# Altium PCB 矩形板V6.0(可制造).pcbdoc (part 2 of 2)
Units mil, origin at the board's own origin, x right, y up, seen from the top; angles counter-clockwise.
Board outline 3015.63 x 3960.03 mil, 2 copper layers (Top Layer, Bottom Layer); 162 components, 167 nets, 711 pads, 292 vias.
Unrouted connection lines stored in the file: 13.
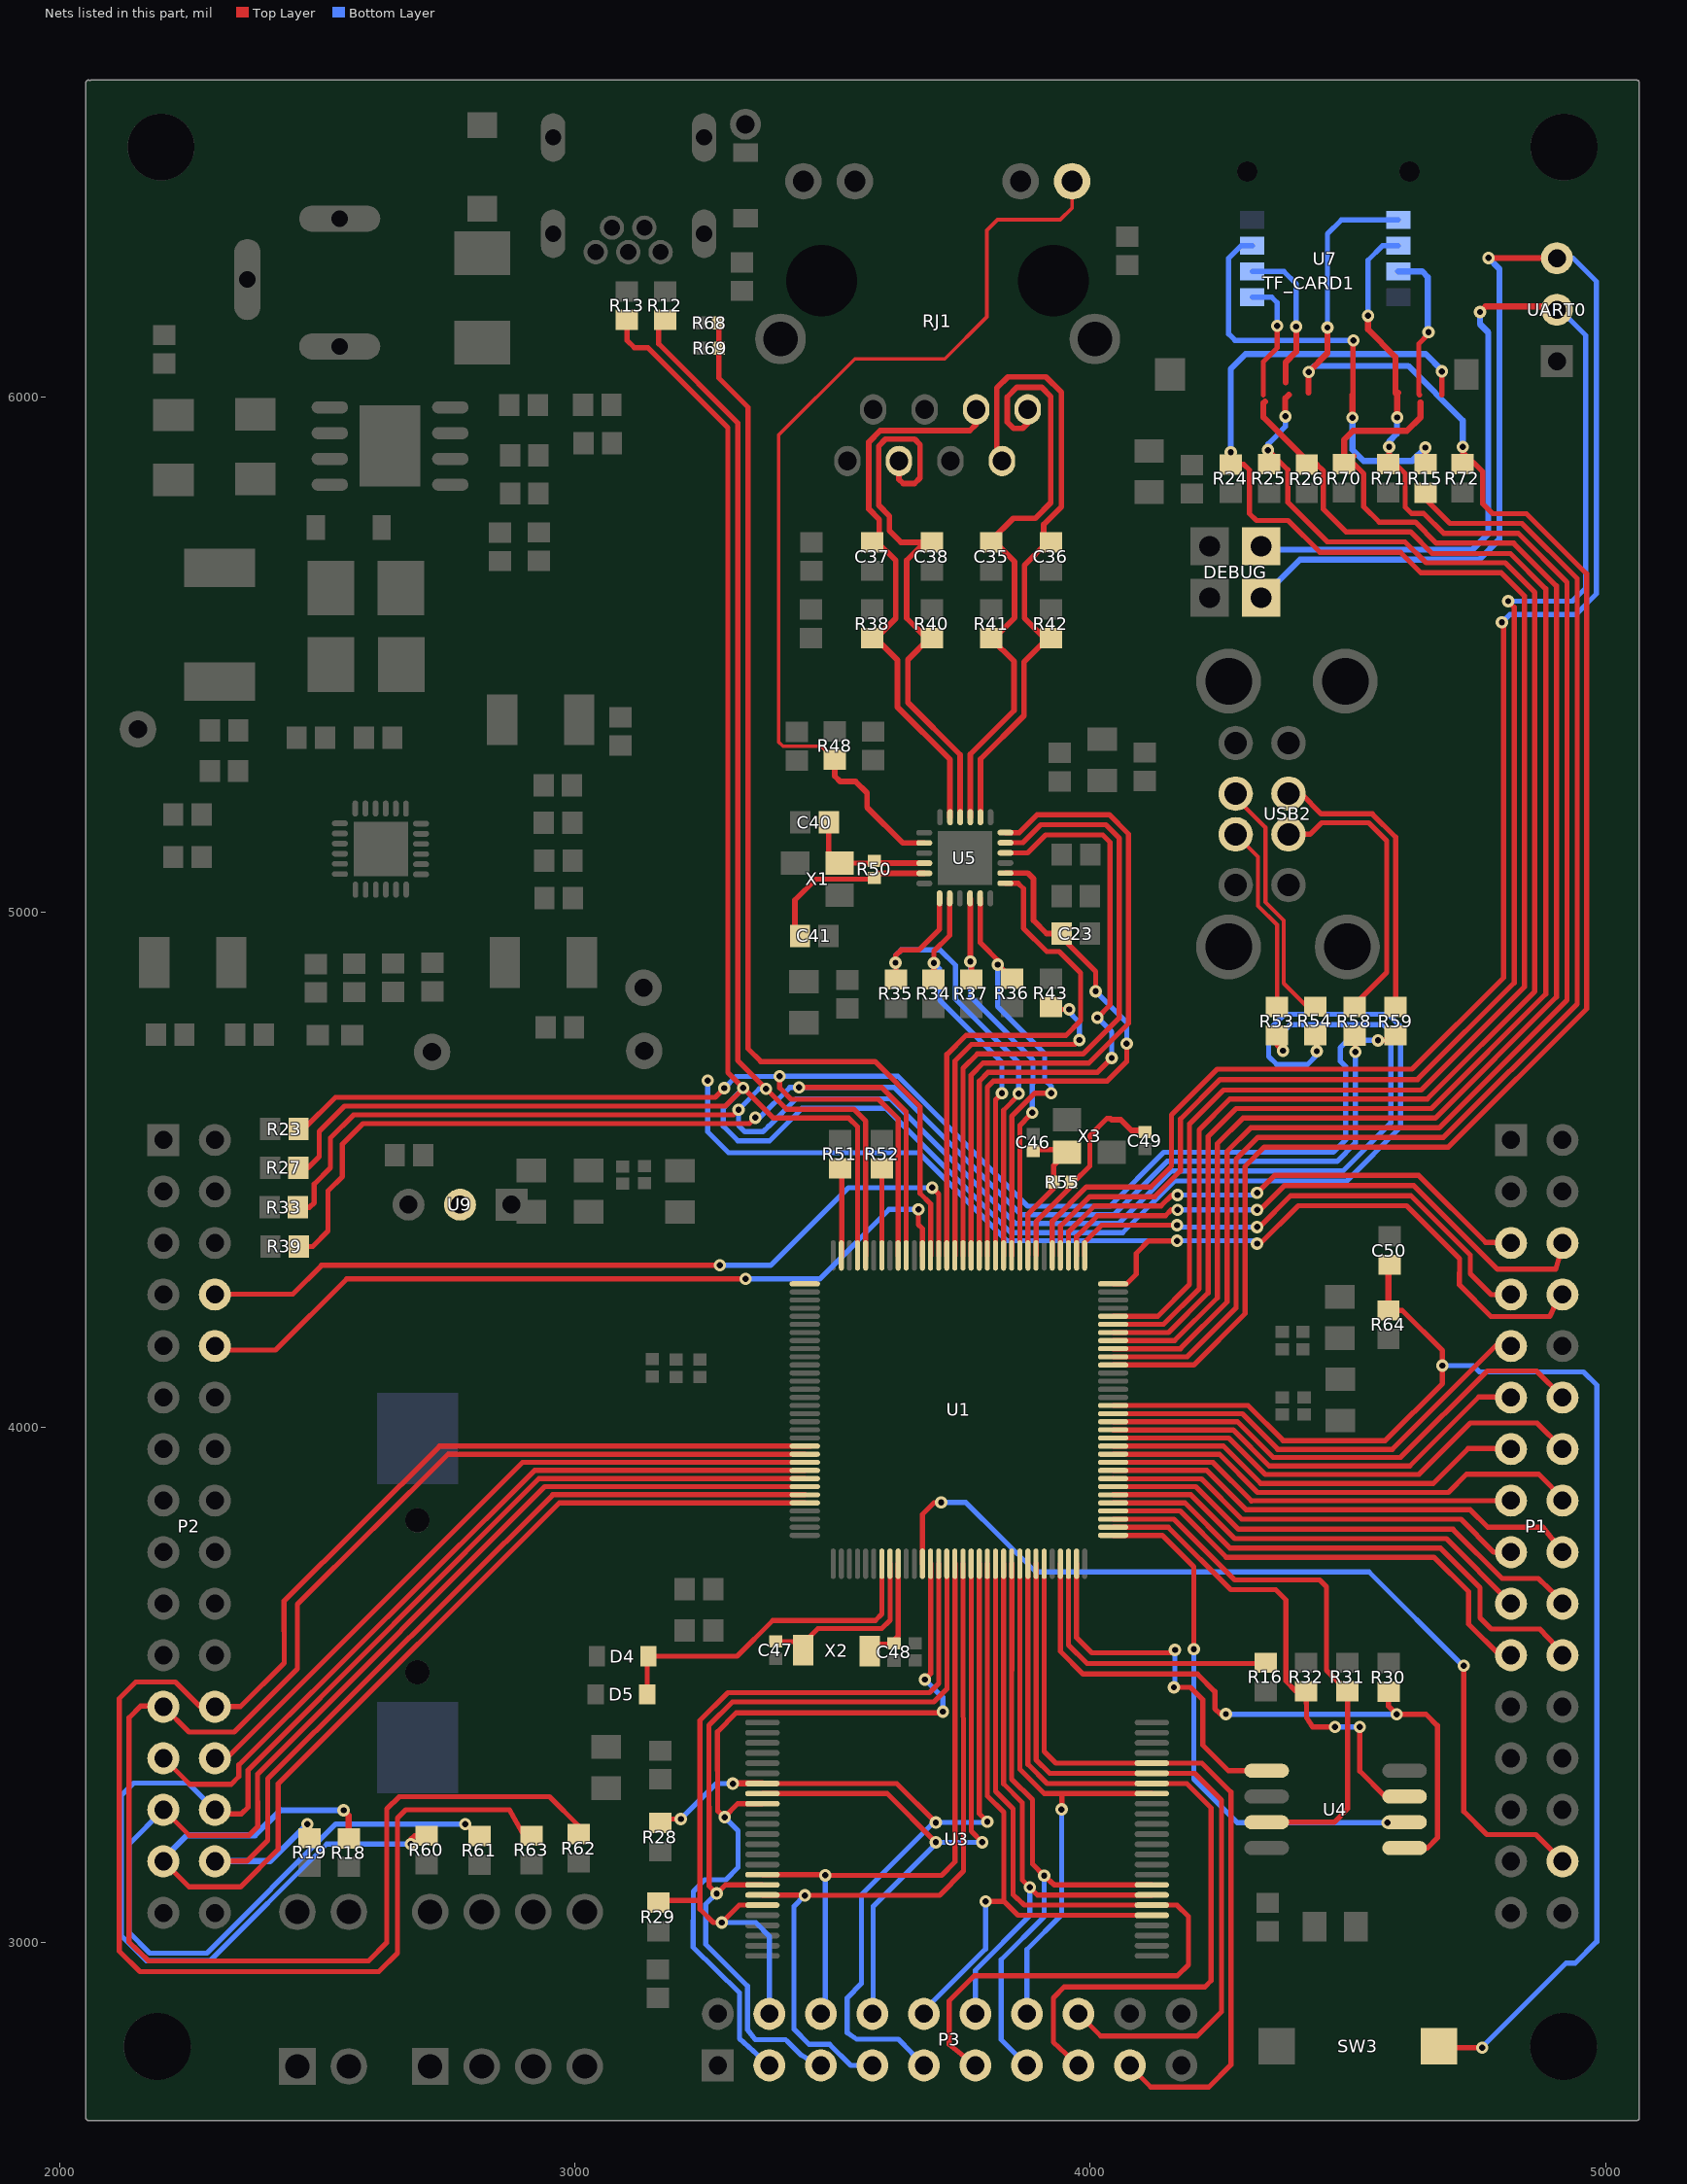
[diagram p2: the nets of this part, all layers, seen from the top]

## Via types
v1: diameter 24, hole 12, Top Layer to Bottom Layer, 292 vias

## Nets (pads, with @x,y where several pads share a name; then routed paths per layer and width w, separated by ;. In a path a pad name is that pad's centre, name@x,y a point inside that pad or via, vN(x,y) a via of type N, cw(c..) or ccw(c..) an arc to the next point about the centre after c; other vN are vias at no path point) (continued)
PC0: P1.30 U1.44 | length 1804.6
  Top Layer w9.84: U1.44@3674.21,3735.64 3674.22,3831.68 3696.32,3853.68 v1@3710.42,3854.48 ; P1.30@4918.95,3155.9 P1.30@4921.09,3158.06
  Top Layer w10: v1(4725.03,3537.59) 4725.03,3254.97 4770,3210 4864.82,3210 P1.30@4916.76,3158.06
  Bottom Layer w9.84: v1@3710.42,3854.48 3758.52,3854.48 3893.92,3719.88 4541.16,3719.88 4723.45,3537.59 v1(4725.03,3537.59)
  other v1: 3710.46,3854.52
PC1: P3.3 U1.45 U3.9 | length 1632.3
  Top Layer w9.84: U3.9@3363.61,3269.88 3315.62,3269.88 v1(3290.23,3243.76) 3276.62,3255.78 3276.38,3409.63 3312.5,3446.22 3711.22,3446.22 v1(3713.61,3448.61) ; v1(3678.96,3510.82) 3690.09,3521.95 U1.45@3690.09,3735.9
  Bottom Layer w9.84: v1(3290.23,3243.76) 3316.32,3217.48 3316.32,3146.18 3292.42,3122.28 3251.82,3122.28 3229.32,3099.78 3229.02,2990.98 3319.12,2903.08 3319.12,2814.18 P3.3@3377,2762
  Bottom Layer w10: v1(3678.96,3510.82) 3713.61,3476.17 v1(3713.61,3448.61)
PC2: P3.4 R29.2 U1.46 U3.19 | length 1576.4
  Top Layer w9.84: R29.2@3156.72,3082.08 3240.82,3082.08 ; U3.19@3363.61,3073.03 3318.67,3073.03 v1(3284.82,3039.18) 3268.32,3039.18 3242.32,3065.18 3242.32,3431.68 3296.32,3485.58 3688.02,3485.58 3705.82,3503.38 U1.46@3705.82,3735.88
  Bottom Layer w10: v1(3284.82,3039.18) 3350.82,3039.18 3377,3013 P3.4@3377,2862
PC3: P3.5 U1.47 U3.17 | length 1638.9
  Top Layer w9.84: v1(3274.84,3095.66) 3260.32,3110.18 3259.82,3421.98 3305.32,3467.48 3696.32,3467.48 3721.62,3492.68 U1.47@3721.62,3735.88 ; v1(3274.84,3095.66) 3291.57,3112.4 U3.17@3363.61,3112.4
  Bottom Layer w9.84: v1(3274.84,3095.66) 3253.72,3075.28 3253.72,2997.08 3334.52,2916.28 3334.52,2831.08 3349.62,2811.88 3408.52,2811.98 3411.72,2809.18 3438.82,2782.08 3472.42,2761.98 P3.5@3477,2762
PC4: P3.6 U1.48 U3.16 | length 1236.4
  Top Layer w9.84: U3.16@3363.61,3132.08 3484.48,3132.08 v1(3485.66,3130.9) ; v1@3485.62,3130.88 3711.22,3130.88 3737.32,3156.98 U1.48@3737.32,3735.88
  Bottom Layer w9.84: P3.6@3477,2862 3485.66,2870.67 v1(3485.66,3130.9)
PC5: P3.7 U1.49 U3.18 | length 1456.9
  Top Layer w9.84: U3.18@3363.61,3092.71 3445.1,3092.71 v1(3445.89,3091.92) 3707.82,3091.88 3753.72,3138.98 U1.49@3753.12,3735.78
  Bottom Layer w10: v1(3445.89,3091.92) 3424.62,3070.65 3424.62,2832.49 3454.1,2803 3493.98,2803 3534.98,2762 P3.7@3577,2762
PC6: P3.8 U1.50 U3.8 | length 1399.5
  Top Layer w9.84: U3.8@3363.61,3289.56 3605.72,3289.56 v1(3700.19,3195.1) ; U1.50@3768.79,3735.9 3768.79,3216.5 v1(3790.19,3195.1)
  Bottom Layer w9.84: P3.8@3577,2862 3578.57,2863.58 3578.57,3070.66 3700.19,3192.28 v1(3700.19,3195.1) v1(3790.19,3195.1)
PC7: P3.9 R28.1 U1.51 U3.7 | length 1862
  Top Layer w9.84: R28.1@3165.19,3232.66 3172.63,3240.1 v1(3205.19,3240.1) ; U3.7@3363.61,3309.25 3624.3,3309.25 v1(3700.19,3233.37) ; U1.51@3784.59,3735.9 3784.59,3250.7 v1(3800.19,3235.1)
  Top Layer w11.81: v1(3306.13,3308.85) 3306.53,3309.25 U3.7@3363.61,3309.25
  Bottom Layer w9.84: P3.9@3677,2762 3627.62,2812.78 3546.32,2812.78 3528.22,2825.38 3528.22,2893.08 3556.12,2921.08 3556.12,3093.48 3696.02,3233.38 v1(3700.19,3233.37) ; v1(3700.19,3233.37) 3798.46,3233.37 v1(3800.19,3235.1)
  Bottom Layer w10: v1(3205.19,3240.1) 3273.94,3308.85 v1(3306.13,3308.85)
PC8: P3.10 U1.52 U3.29 | length 1270.6
  Top Layer w9.84: v1(3796.68,3080.5) 3832.12,3080.5 ; U1.52@3800.32,3735.88 3800.32,3284.98 3832.12,3253.18 3832.12,3080.48 ; U3.29@4119.52,3053.38 3859.62,3053.38 3832.12,3080.48
  Bottom Layer w10: P3.10@3677,2862 3677,2868.21 3796.68,2987.89 v1(3796.68,3080.5)
PC9: P3.11 U1.53 U3.30 | length 1750.9
  Top Layer w9.84: P3.11@3777,2762 3726.22,2802.58 3726.22,2887.58 3774.52,2935.98 4169.02,2935.98 4190.42,2957.28 4190.42,3050.98 4168.32,3072.98 U3.30@4119.51,3073.03 3871.82,3072.98 3850.22,3093.58 3850.22,3260.08 3816.12,3293.78 U1.53@3816.12,3735.88
PC10: P3.12 U1.54 U3.31 | length 1181.8
  Top Layer w9.84: U1.54@3831.82,3735.88 3831.82,3308.48 3868.32,3271.88 3868.32,3121.86 v1(3882.51,3107.67) 3897.47,3092.71 U3.31@4119.51,3092.71
  Bottom Layer w10: P3.12@3777,2862 3777,2947 3882.51,3052.51 v1(3882.51,3107.67)
PC11: P3.13 U1.55 U3.32 | length 1271.1
  Top Layer w9.84: U1.55@3847.62,3735.88 3847.42,3317.78 3887.62,3277.68 3887.62,3152.95 v1(3910.46,3130.11) 3930.42,3112.38 U3.32@4119.51,3112.4
  Bottom Layer w10: P3.13@3877,2762 3827.02,2811.98 3827.02,2967.02 3910.46,3050.46 v1(3910.46,3130.11)
PC12: P3.14 U1.56 U3.41 | length 1130.4
  Top Layer w9.84: U1.56@3863.29,3735.9 3863.29,3337 3910.72,3289.56 U3.41@4119.51,3289.56 ; v1(3944.32,3258.85) 3944.77,3259.3 3944.77,3289.56
  Bottom Layer w10: P3.14@3877,2862 3877,2987 3944.32,3054.32 v1(3944.32,3258.85)
PC13: P3.15 U1.57 U3.42 | length 1588
  Top Layer w9.84: U1.57@3879.09,3735.9 3879.09,3346.2 3916.03,3309.25 U3.42@4119.51,3309.25 ; P3.15@3977,2762 3928.22,2807.28 3928.22,2893.08 3949.32,2914.38 4222.62,2914.38 4234.42,2926.58 4234.52,3261.88 4187.22,3309.28 U3.42@4119.52,3309.28
PC14: P3.16 U1.58 U3.43 | length 1498.8
  Top Layer w9.84: U1.58@3894.79,3735.9 3894.79,3355.5 3921.36,3328.93 U3.43@4119.51,3328.93 ; P3.16@3977,2862 4020.32,2819.08 4207.72,2819.08 4254.92,2866.28 4254.92,3276.98 4203.02,3328.88 U3.43@4119.51,3328.93
PC15: P3.17 U1.59 U3.44 | length 1521.7
  Top Layer w9.84: U1.59@3910.62,3735.88 3910.62,3371.38 3933.38,3348.62 U3.44@4119.51,3348.62 4216.72,3348.58 4273.02,3292.38 4273.02,2763.02 4230,2720 4117.4,2720 P3.17@4075.42,2761.98
PD2: R30.1 U1.61 U4.1 | length 1321.7
  Top Layer w10: U1.61@3942.02,3735.68 3942.02,3565.48 3986.02,3521.48 4208.12,3521.48 4241.92,3487.58 4241.92,3454.48 4252.62,3443.88 v1(4263.22,3443.89) ; R30.1@4578.92,3487.58 4578.92,3459.28 v1(4594.71,3443.49) 4652.02,3443.48 4673.82,3421.48 4673.82,3203.38 4654.32,3183.88 U4.1@4610.02,3183.88
  Bottom Layer w10: v1(4263.22,3443.89) 4263.62,3443.49 v1(4594.71,3443.49)
PD3: R16.2 U1.62 | length 552.8
  Top Layer w10: U1.62@3957.71,3735.64 3957.71,3578.14 3993.93,3541.92 R16.2@4338.02,3541.92
PD4: U1.63 U4.5 | length 723.7
  Top Layer w10: U1.63@3973.41,3735.64 3973.41,3592.36 4002.98,3562.79 4164.4,3562.79 v1(4164.4,3568.3) ; v1(4162.43,3495.86) 4194.31,3495.86 4218.33,3471.84 4218.33,3384.05 4268.53,3333.85 U4.5@4342.35,3333.85
  Bottom Layer w10: v1(4162.43,3495.86) 4164.4,3497.83 v1(4164.4,3568.3)
PD5: U1.65 U4.2 | length 1038.2
  Top Layer w10: U1.65@4044.32,3790.78 4139.62,3790.78 4201.01,3729.39 v1(4201.01,3569.87) ; v1(4576.99,3233.26) 4609.48,3233.26 U4.2@4610.07,3233.85
  Bottom Layer w10: v1(4201.01,3569.87) 4201.01,3317.49 4285.24,3233.26 v1(4576.99,3233.26)
PD6: R32.1 U1.66 U4.3 | length 956.4
  Top Layer w10: U1.66@4044.32,3806.58 4151.32,3806.58 4272.62,3685.18 4360.02,3685.18 4379.72,3665.58 4379.72,3508.08 4399.42,3488.38 R32.1@4419.12,3488.38 4419.91,3436.41 4431.72,3419.09 v1(4475.03,3419.09) ; v1(4523.06,3419.09) 4523.06,3333.26 4572.47,3283.85 U4.3@4610.07,3283.85
  Bottom Layer w10: v1(4475.03,3419.09) v1(4523.06,3419.09)
PD7: R31.1 U1.67 U4.7 | length 1084.5
  Top Layer w10: U1.67@4044.32,3822.28 4162.42,3822.28 4280.52,3704.08 4445.12,3704.08 4458.52,3690.78 4458.52,3528.94 4499.08,3488.38 R31.1@4499.44,3488.38 ; U4.7@4342.35,3233.85 4473.26,3233.85 4499.44,3260.03 R31.1@4499.44,3488.38
PD8: P1.21 U1.68 | length 924.8
  Top Layer w10: U1.68@4044.32,3837.98 4174.32,3837.98 4264.02,3748.18 4666.72,3748.18 4734.52,3681.48 4734.42,3618.38 4795.12,3557.68 P1.21@4816.22,3557.68
PD9: P1.22 U1.69 | length 1034.5
  Top Layer w10: U1.69@4044.32,3853.78 4183.72,3853.78 4271.12,3766.28 4679.42,3766.28 4756.52,3689.18 4756.52,3630.48 4778.22,3608.88 4873.02,3608.88 P1.22@4921.12,3558.08
PD10: P1.19 U1.70 | length 860.4
  Top Layer w10: U1.70@4044.32,3869.48 4195.52,3869.48 4280.52,3784.48 4691.52,3784.48 P1.19@4816.76,3658.06
PD11: P1.20 U1.71 | length 970.2
  Top Layer w10: U1.71@4044.32,3885.28 4204.92,3885.28 4287.62,3802.58 4704.12,3802.58 4799.42,3706.98 4869.51,3706.88 P1.20@4921.12,3658.08
PD12: P1.17 U1.72 | length 835.8
  Top Layer w10: U1.72@4044.32,3900.98 4215.92,3900.18 4293.92,3822.28 4719.42,3822.28 4783.02,3758.08 P1.17@4821.12,3758.08
PD13: P1.18 U1.73 | length 941.6
  Top Layer w10: U1.73@4044.32,3916.78 4226.22,3916.78 4302.62,3840.38 4737.62,3840.38 4771.52,3806.48 4878.62,3806.48 P1.18@4916.72,3758.08
PD14: P1.15 U1.74 | length 803.4
  Top Layer w10: U1.74@4044.32,3932.48 4238.02,3932.48 4312.82,3857.68 P1.15@4816.76,3858.06
PD15: P1.16 U1.75 | length 943.3
  Top Layer w10: U1.75@4044.32,3948.28 4250.62,3948.18 4324.62,3874.18 4695.12,3874.18 4730.22,3909.28 4870.42,3909.28 P1.16@4921.12,3858.08
PE0: R37.2 U1.105 U5.10 | length 805
  Top Layer w10: U1.105@3863.21,4334.03 3863.21,4586.4 3872.67,4595.86 3872.67,4596.25 v1(3887.63,4611.21)
  Top Layer w11.02: R37.2@3758.1,4880.11 R37.2@3768.73,4869.48 3768.73,4902.94 v1(3767.15,4904.52) 3767.15,5026.44 U5.10@3766.53,5027.07
  Bottom Layer w10: v1(3767.15,4904.52) 3767.15,4837.2 3840.82,4763.53 3840.82,4761.18 3888.82,4713.18 3888.82,4667.48 3887.63,4666.29 v1(3887.63,4611.21)
PE1: R36.2 U1.106 U5.11 | length 839.3
  Top Layer w10: U5.11@3786.23,5027.07 3786.22,4941.35 3792.74,4934.83 3820.3,4907.28 v1(3820.3,4898.22) 3820.68,4898.22 R36.2@3847.86,4871.05 ; U1.106@3847.51,4334.03 3847.52,4603.78 3892.72,4648.98 v1(3924.24,4649)
  Bottom Layer w10: v1(3820.3,4898.22) 3820.3,4817.12 3911.64,4725.78 3911.64,4674.6 3924.24,4662 v1(3924.24,4649)
PE2: R35.2 U1.107 U5.7 | length 986.6
  Top Layer w10: v1(3621.88,4902.15) 3622.67,4901.37 R35.2@3622.67,4869.48 ; v1(3621.88,4902.15) 3621.92,4915.98 3632.92,4926.98 3667.22,4926.98 3707.52,4967.28 U5.7@3707.53,5027.07 ; U1.107@3831.71,4334.03 3831.71,4615.93 3860.85,4645.07 v1(3860.85,4648.22)
  Bottom Layer w10: v1(3621.88,4902.15) 3621.92,4915.98 3632.92,4926.98 3708.52,4926.98 3738.42,4897.08 3738.42,4831.28 3860.82,4708.88 v1@3860.82,4648.18
PE3: R34.2 U1.108 U5.8 | length 794.6
  Top Layer w10: v1(3696.29,4901.76) 3696.32,4924.58 3727.22,4955.48 U5.8@3727.23,5027.07 ; U1.108@3816.01,4334.03 3816.01,4636.44 v1(3828.57,4649)
  Top Layer w11.02: v1(3696.29,4901.76) 3696.29,4875.71 R34.2@3698.22,4873.78
  Bottom Layer w10: v1(3696.29,4901.76) 3707.71,4890.35 3707.71,4829.33 3828.57,4708.47 v1(3828.57,4649)
PE4: C23.2 U1.109 U5.14 | length 1126.3
  Top Layer w10: U1.109@3800.21,4334.03 3800.22,4660.78 3811.62,4672.28 4032.52,4672.28 4070.72,4710.38 v1(4070.7,4745.07) ; C23.2@3944.32,4958.45 3944.32,4951.38 4010.42,4885.18 v1@4010.42,4846.68
  Top Layer w11.02: U5.14@3835.22,5075.98 3878.72,5075.98 3890.02,5064.78 3890.02,4984.08 3915.22,4958.88 3936.42,4958.88 C23.2@3944.32,4966.68
  Bottom Layer w10: v1(4010.46,4846.64) 4070.7,4786.4 v1(4070.7,4745.07)
PE5: U1.110 U5.16 | length 1277.8
  Top Layer w10: U1.110@3784.51,4334.03 3784.52,4672.28 3801.42,4689.18 4013.62,4689.18 v1@4041.52,4717.08 ; U5.16@3835.27,5115.31 3878.34,5115.31 3913.22,5150.19 4024.24,5150.19 4038.41,5136.02 4038.41,4819.88 v1(4014,4795.46)
  Bottom Layer w10: v1(4014,4795.46) 4041.56,4767.9 v1(4041.56,4717.11)
PE6: U1.111 U5.18 | length 1334
  Top Layer w10: U1.111@3768.71,4334.03 3768.72,4683.98 3791.92,4707.28 3997.42,4707.28 4074.22,4784.08 4074.22,5152.18 4036.82,5189.58 3897.12,5189.58 3862.22,5154.68 U5.18@3835.22,5154.68
PE7: U1.112 U5.17 | length 1302.1
  Top Layer w10: U1.112@3753.01,4334.03 3753.02,4697.08 3780.92,4724.98 3986.02,4724.98 4056.52,4795.48 4056.52,5143.48 4030.12,5169.88 3904.12,5169.88 3869.32,5134.98 U5.17@3835.22,5134.98
PE8: R43.1 U1.113 | length 743.4
  Top Layer w10: U1.113@3737.21,4334.03 3737.22,4711.18 3769.52,4743.48 3970.32,4743.48 v1@3978.92,4752.18 ; R43.1@3923.45,4815.94 3927.79,4811.6 v1(3959.28,4811.6)
  Bottom Layer w10: v1(3959.28,4811.6) 3956.53,4808.85 3978.96,4786.41 v1(3978.96,4752.15)
PE9: U1.114 U5.13 | length 1032.6
  Top Layer w10: U1.114@3721.51,4334.03 3721.52,4724.18 3758.52,4761.18 3952.62,4761.18 3981.32,4789.98 3981.32,4882.08 3939.62,4923.78 3915.62,4923.78 3870.32,4969.08 3870.32,5045.88 3859.82,5056.28 U5.13@3835.22,5056.28
PE10: P2.8 U1.115 | length 1614.4
  Top Layer w10: P2.8@2301.02,4258.48 2451.82,4258.88 2507.69,4314.75 v1(3280.93,4314.75) ; v1(3693.14,4465.54) 3705.72,4452.96 U1.115@3705.72,4334.08
  Bottom Layer w10: v1(3280.93,4314.75) 3379.59,4314.75 3530.38,4465.54 v1(3693.14,4465.54)
PE11: R68.1 R69.2 U1.116 | length 2110.6
  Top Layer w10: R69.2@3279.13,6094.67 3279.12,6036.68 3335.62,5980.08 3335.62,4735.18 3360.42,4710.38 3582.12,4710.38 3669.52,4622.98 3669.52,4454.48 3690.02,4433.98 U1.116@3690.01,4334.03
  Top Layer w11.02: R68.1@3277.56,6143.89 3279.13,6142.31 R69.2@3279.13,6094.67
PE12: P2.10 U1.117 | length 1584.1
  Top Layer w10: P2.10@2288.02,4150.18 2418.32,4150.18 2556.52,4288.38 v1(3330.93,4288.37) ; v1(3666.37,4423.41) 3666.37,4393.93 3674.22,4386.08 U1.117@3674.22,4334.08
  Bottom Layer w10: v1(3330.93,4288.37) 3474.42,4288.38 3609.45,4423.41 v1(3666.37,4423.41)
PF0: R72.1 TF_CARD1.3 U1.86 U7.5 | length 3506.7
  Top Layer w10: U1.86@4044.31,4121.44 4200.92,4121.38 4300.62,4221.08 4300.62,4506.88 4338.02,4544.28 4695.12,4544.28 4963.62,4812.78 4963.62,5656.88 4846.72,5773.78 4780.92,5773.78 4761.64,5793.06 4761.64,5855.31 4723.06,5893.88 v1(4723.06,5903.33) 4723.06,5870.62 R72.1@4722.27,5869.87
  Top Layer w11.81: 4423.82,6008.48 v1@4423.82,6048.58 ; v1@4423.85,6048.61 4460.46,6085.22 v1(4460.46,6134.83)
  Bottom Layer w10: v1(4460.46,6134.83) 4460.46,6316.72 4487.43,6343.69 U7.5@4597.86,6343.69
  Bottom Layer w11.81: v1@4423.85,6048.61 4435.66,6060.42 4617.15,6060.42 4723.06,5954.52 v1(4723.06,5903.33)
  other v1: 4423.85,6048.61
PF1: R15.1 U1.87 | length 2549.7
  Top Layer w10: U1.87@4044.32,4137.28 4188.12,4137.28 4282.92,4232.08 4282.92,4520.68 4325.42,4563.18 4686.02,4563.18 4945.12,4822.28 4945.12,5647.78 4838.02,5754.88 4697.92,5754.88 4650.62,5802.18 R15.1@4650.61,5814.37
PF2: R71.1 TF_CARD1.7 U1.88 U7.6 | length 3114.7
  Top Layer w10: U1.88@4044.31,4152.94 4174.92,4152.88 4265.62,4243.58 4265.62,4535.98 4311.22,4581.68 4677.42,4581.68 4925.42,4829.68 4925.42,5640.78 4830.52,5735.58 4685.72,5735.58 4647.12,5774.18 4623.42,5774.18 4611.22,5786.38 4611.22,5851.38 4592.72,5869.88 R71.1@4578.52,5869.88
  Top Layer w11.81: v1(4539.2,6157.66) 4539.22,6131.28 4592.32,6078.18 4592.32,6008.08 TF_CARD1.7@4595.9,6004.52 ; R71.1@4580.14,5879.63 v1(4580.14,5903.33) ; v1(4595.5,5960.42) 4595.52,6006.08 4597.82,6008.48
  Bottom Layer w10: v1(4539.2,6157.66) 4539.22,6265.58 4567.32,6293.68 U7.6@4597.82,6293.68
  Bottom Layer w11.81: v1(4580.14,5903.33) 4580.14,5913.57 4595.1,5928.53 4595.1,5960.03 v1(4595.5,5960.42)
PF3: R70.1 TF_CARD1.8 U1.89 U7.7 | length 3226.3
  Top Layer w9.84: R70.1@4491.96,5869.89 4496.29,5869.89 R70.1@4512.43,5886.02
  Top Layer w10: U1.89@4044.31,4168.73 4163.62,4168.68 4246.72,4251.78 4246.72,4550.98 4296.32,4600.58 4669.92,4600.58 4904.92,4835.58 4904.92,5633.28 4821.92,5716.28 4671.92,5716.28 4630.92,5757.28 4560.82,5757.28 4530.92,5787.18 4530.92,5850.98 4512.02,5869.88 R70.1@4492.74,5869.88 ; TF_CARD1.8@4639.2,6004.52 4637.62,6006.09 4637.62,6103.34 4656.52,6122.23 v1(4656.52,6125.77)
  Top Layer w11.81: R70.1@4492.74,5869.88 4492.72,5917.08 4510.12,5934.48 4614.82,5934.48 4640.82,5960.38 4640.82,5989.68
  Bottom Layer w11.81: U7.7@4597.86,6243.69 4640.77,6243.69 4644.51,6243.69 4655.34,6232.86 4655.34,6126.95 v1(4656.52,6125.77)
PF4: R26.1 TF_CARD1.1 U1.90 U7.1 | length 3084.5
  Top Layer w10: U1.90@4044.32,4184.48 4151.82,4184.48 4228.62,4261.18 4228.62,4564.78 4282.92,4619.08 4662.02,4619.08 4884.12,4841.18 4884.12,5627.68 4815.62,5696.28 4663.62,5696.28 4621.52,5738.38 4496.32,5738.38 4452.62,5782.08 4452.62,5856.48 4440.02,5869.08 R26.1@4420.3,5869.09 ; TF_CARD1.1@4336.05,6004.52 4336.02,6068.28 4362.82,6095.08 v1(4362.82,6137.98)
  Top Layer w11.81: 4339.22,5991.18 4336.02,5987.98 4336.02,5960.78 4420.32,5876.58 R26.1@4420.3,5869.09
  Bottom Layer w10: U7.1@4314.4,6193.69 4352.39,6193.69 4362.82,6183.26 v1(4362.82,6137.98)
PF5: R25.1 TF_CARD1.2 U1.91 U7.2 | length 3156.9
  Top Layer w10: U1.91@4044.32,4200.28 4142.02,4200.28 4211.22,4269.48 4211.22,4577.78 4271.12,4637.58 4654.12,4637.58 4862.82,4846.28 4862.82,5620.68 4805.32,5678.18 4651.72,5678.18 4610.82,5719.08 4460.12,5719.08 4383.32,5795.88 4383.32,5858.88 v1@4345.12,5897.08 ; v1@4345.17,5897.03 4347.07,5895.14 R25.1@4347.07,5869.48
  Top Layer w11.81: v1(4378.57,5962.39) 4378.57,5997.43 4385.22,6004.08 ; 4379.32,6028.88 4379.32,6049.78 4379.32,6067.48 4399.82,6087.98 v1(4399.83,6136.8)
  Bottom Layer w10: U7.2@4314.4,6243.69 4376.01,6243.69 4399.83,6219.87 v1(4399.83,6136.8) ; v1(4345.1,5897.03) 4345.1,5908.85 4378.57,5942.31 v1(4378.57,5962.39)
PF6: R24.1 TF_CARD1.9 U1.92 | length 3397.1
  Top Layer w10: U1.92@4044.31,4215.94 4130.92,4215.88 4192.72,4277.68 4192.72,4589.18 4258.42,4654.88 4642.32,4654.88 4842.72,4855.28 4842.72,5613.98 4797.82,5658.88 4641.92,5658.88 4602.22,5698.58 4445.92,5698.58 4384.12,5760.38 4322.62,5760.38 4308.92,5774.18 4308.92,5858.48 4298.22,5869.08 R24.1@4272.62,5869.08 ; TF_CARD1.9@4682.51,6004.52 v1(4682.51,6049.79)
  Top Layer w11.81: R24.1@4272.62,5869.08 v1(4272.62,5892.7)
  Bottom Layer w11.81: v1(4272.62,5892.7) 4272.62,6054.48 4301.39,6083.26 4651.05,6083.26 4682.51,6051.79 v1(4682.51,6049.79)
PF7: P1.8 U1.96 | length 2208.8
  Top Layer w10: U1.96@4044.32,4278.98 4070.32,4278.98 4089.22,4297.78 4089.22,4337.98 4113.63,4362.39 v1(4168.33,4362.39) ; v1@4323.82,4356.88 4325.02,4355.68 4328.92,4355.68 4403.72,4430.48 4614.02,4430.48 4716.82,4327.68 4716.72,4276.58 4777.82,4215.58 4892.32,4215.58 4911.72,4258.08 P1.8@4916.72,4258.08
  Bottom Layer w9.84: v1(3257.31,4673.41) 3257.32,4573.78 3297.82,4533.28 3667.13,4533.28 3838.02,4362.39 v1(4168.33,4362.39) 4318.34,4362.39 v1@4323.85,4356.88
  other v1: 4323.85,4356.88
PF8: P1.7 U1.97 | length 994.5
  Top Layer w10: U1.97@3989.22,4334.08 3989.22,4359.68 4022.25,4392.71 v1(4168.33,4392.71) ; v1@4323.82,4389.18 4328.22,4389.18 4388.82,4449.78 4622.62,4449.78 4737.62,4334.78 4737.62,4298.58 4778.42,4257.78 P1.7@4817.12,4258.08
  Bottom Layer w10: v1(4168.33,4392.71) 4171.88,4389.16 v1@4323.85,4389.16
  other v1: 4323.85,4389.16
PF9: P1.6 U1.98 | length 1130.1
  Top Layer w10: U1.98@3973.42,4333.28 3973.42,4370.68 4013.92,4411.18 4145.92,4411.18 4156.97,4422.23 v1(4169.51,4422.23) ; v1@4323.82,4422.28 4329.42,4422.28 4376.62,4469.48 4628.22,4469.48 4790.42,4307.28 4903.52,4307.28 P1.6@4918.82,4359.58
  Bottom Layer w10: v1(4169.51,4422.23) v1@4323.84,4422.23
  other v1: 4323.85,4422.23
PF10: P1.5 U1.99 | length 1003.8
  Top Layer w10: U1.99@3957.72,4334.08 3957.72,4379.78 4008.12,4430.08 4137.22,4430.08 4158.52,4451.38 v1(4169.51,4451.37) ; v1@4323.82,4455.28 4357.72,4489.18 4637.62,4489.18 4767.52,4359.28 P1.5@4816.72,4359.28
  Bottom Layer w10: v1(4169.51,4451.37) 4319.91,4451.37 v1@4323.85,4455.31
  other v1: 4323.85,4455.3
PG0: P2.29 R18.1 U1.28 | length 2114.4
  Top Layer w10: P2.29@2201.02,3158.48 2251.02,3108.48 2350.22,3108.48 2423.82,3182.08 2423.82,3308.88 2969.32,3853.78 U1.28@3445.92,3853.78
  Top Layer w11.81: v1(2550.62,3257.27) 2560.46,3247.43 R18.1@2560.46,3202.55
  Bottom Layer w11.81: P2.29@2188.02,3150.18 2246.32,3208.48 2378.62,3208.48 2427.92,3257.78 v1(2550.62,3257.27)
PG1: P2.30 R19.1 U1.27 | length 1747
  Top Layer w10: P2.30@2301.02,3158.48 2362.82,3158.48 2403.42,3198.98 2403.42,3318.38 2956.62,3869.48 U1.27@3445.92,3869.48
  Top Layer w11.81: v1(2480.15,3230.5) 2480.15,3207.28 R19.1@2484.48,3202.95
  Bottom Layer w11.81: P2.30@2301.01,3158.45 2408.1,3158.45 v1(2480.15,3230.5)
PG3: P2.27 R61.1 U1.26 | length 2682.4
  Top Layer w10: P2.27@2201.02,3258.48 2251.02,3208.48 2366.72,3208.48 2383.72,3225.28 2383.62,3327.28 2940.92,3885.28 U1.26@3445.92,3885.28 ; v1(2786.84,3230.5) 2810.46,3206.88 R61.1@2814.4,3206.89
  Bottom Layer w9.84: P2.27@2200.62,3258.88 P2.27@2201.02,3258.88
  Bottom Layer w10: P2.27@2200.62,3258.07 2134.12,3191.58 2134.12,3020 2174.12,2980 2285.14,2980 2535.64,3230.5 v1(2786.84,3230.5)
PG5: P2.28 R60.1 U1.25 | length 2673.9
  Top Layer w10: P2.28@2288.02,3250.18 2352.22,3250.18 2365.22,3263.18 2365.22,3335.58 2929.52,3900.98 U1.25@3445.92,3900.98 ; v1(2680.94,3191.53) 2680.94,3200.2 2688.42,3207.67 R60.1@2711.64,3207.67
  Bottom Layer w10: P2.28@2300.62,3258.07 2248.69,3310 2143.24,3310 2118.73,3285.49 2118.73,3014.18 2167.91,2965 2291.35,2965 2517.88,3191.53 v1(2680.94,3191.53)
PG6: P2.25 U1.24 | length 1530.6
  Top Layer w10: P2.25@2201.02,3358.48 2251.82,3307.68 2332.22,3307.68 2347.12,3322.78 2347.12,3345.18 2921.42,3916.78 U1.24@3445.92,3916.78
PG7: P2.26 U1.23 | length 1382.6
  Top Layer w10: P2.26@2301.02,3358.48 2323.82,3358.48 2897.92,3932.48 U1.23@3445.92,3932.48
PG8: P2.23 R62.1 U1.22 | length 3284.7
  Top Layer w10: P2.23@2201.02,3458.48 2250.62,3408.88 2338.02,3408.88 2460.82,3531.58 2460.82,3656.98 2753.62,3948.28 U1.22@3445.92,3948.28 ; P2.23@2201.02,3459.28 2156.52,3459.28 2134.12,3436.78 2134.12,3001.78 2171.92,2964.88 2599.42,2965.18 2634.52,3000.28 2634.52,3259.68 2658.52,3283.68 2950.22,3283.68 3007.32,3226.58 R62.1@3007.31,3210.82
PG9: P2.24 R63.1 U1.21 | length 3273.9
  Top Layer w9.84: P2.24@2301.02,3458.08 2272.22,3458.08 2224.22,3506.08 2147.22,3506.08 2115.22,3474.18 2115.22,2983.58 2155.02,2943.88 2618.72,2943.88 2654.92,2980.08 2654.92,3241.88 2671.12,3258.08 2872.32,3258.08 2900.62,3207.68 R63.1@2915.19,3207.67
  Top Layer w10: P2.24@2301.02,3458.48 2350.52,3458.48 2435.42,3542.88 2435.12,3663.58 2736.82,3963.98 U1.21@3456.12,3963.98
PG11: P1.13 U1.76 | length 830.6
  Top Layer w10: U1.76@4044.32,3963.98 4258.52,3963.98 4330.92,3891.48 4665.73,3891.48 4733.49,3959.24 P1.13@4816.76,3959.24
PG12: P1.14 U1.77 | length 963.7
  Top Layer w10: U1.77@4044.32,3979.78 4268.72,3979.78 4339.62,3908.88 4638.02,3908.88 4738.02,4008.88 4867.12,4008.88 P1.14@4916.72,3959.28
PG13: P1.11 U1.78 | length 856.9
  Top Layer w10: U1.78@4044.32,3995.48 4277.32,3995.48 4347.42,3925.38 4620.32,3925.38 4754.12,4059.28 P1.11@4816.72,4059.28
PG14: P1.12 U1.79 | length 991.3
  Top Layer w10: U1.79@4044.32,4011.28 4286.02,4011.18 4355.32,3941.88 4602.22,3941.88 4770.82,4109.68 4866.32,4109.68 P1.12@4916.72,4059.28
PG15: P1.9 U1.80 | length 884.9
  Top Layer w10: U1.80@4044.32,4026.98 4295.52,4026.98 4363.92,3957.68 4586.42,3957.68 4788.02,4159.28 P1.9@4816.72,4159.28
RESET: C50.2 R64.1 SW3.2 U1.81 | length 2793.7
  Top Layer w10: U1.81@4044.32,4042.78 4306.12,4042.78 4374.22,3974.58 4572.72,3974.58 4683.69,4085.55 v1(4683.69,4120.26) 4683.69,4149.41 4605.82,4227.28 R64.1@4578.81,4227.31 ; SW3.2@4676.99,2799.01 4679.75,2796.25 v1(4760.85,2796.25)
  Top Layer w11.81: R64.1@4578.81,4227.31 4578.81,4313.92 C50.2@4580.78,4315.89
  Bottom Layer w9.84: v1(4683.69,4120.26) 4743.14,4120.26 4755.34,4108.06 4957.7,4108.06 4983.29,4082.47 4983.29,3001.37 4982.11,3001.37 4941.17,2960.43 4923.45,2960.43 4760.85,2797.83 v1(4760.85,2796.25)
RTCVD: D4.2 D5.2 U1.39 | length 660
  Top Layer w9.84: D5.2@3139.99,3482.08 3139.99,3553.74 D4.2@3142.35,3556.1 ; D4.2@3142.32,3556.08 3314.42,3556.08 3383.72,3625.38 3582.82,3625.38 3595.62,3638.08 U1.39@3595.62,3735.88
RXD0: DEBUG.c U1.100 UART0.2 | length 3713.3
  Top Layer w10: U1.100@3942.01,4334.03 3942.02,4391.18 3999.02,4448.18 4125.02,4448.18 4175.02,4498.18 4175.02,4598.58 4251.82,4675.38 4635.22,4675.38 4823.02,4863.18 4823.02,5591.88 v1@4811.22,5603.68
  Top Layer w11.81: v1(4756.52,6165.14) 4767.15,6175.78 4899.43,6175.78 UART0.2@4905.73,6169.48
  Bottom Layer w10: v1(4811.25,5603.73) 4936.05,5603.73 4961.64,5629.32 4961.64,6119.48 4911.64,6169.48 UART0.2@4905.73,6169.48
  Bottom Layer w11.81: DEBUG.c@4331.72,5710.42 4369.12,5703.68 4741.52,5703.68 4772.62,5734.78 4772.62,6125.38 4756.52,6141.48 v1@4756.52,6165.18
RXN: C38.1 R40.1 RJ1.6 U5.22 | length 1156.9
  Top Layer w10.98: RJ1.6@3628.72,5876.18 3628.72,5840.18 3636.82,5832.08 3658.52,5832.08 3669.52,5843.08 3669.52,5907.68 3658.92,5918.28 3602.62,5918.28 3589.22,5904.88 3589.22,5789.98 3610.02,5769.08 3610.02,5740.38 3632.52,5717.88 C38.1@3692.48,5717.9 3678.62,5717.88 3643.52,5682.88 3643.52,5570.68 3681.72,5532.48 R40.1@3692.49,5532.47 3688.02,5532.48 3645.92,5490.38 3645.92,5407.28 3747.52,5305.68 U5.22@3747.52,5184.58
RXP: C37.1 R38.1 RJ1.3 U5.23 | length 1101.2
  Top Layer w10.98: R38.1@3577,5532.47 R38.1@3582.92,5532.48 ; U5.23@3727.82,5184.58 3727.82,5296.18 3625.42,5398.58 3625.42,5489.98 R38.1@3582.92,5532.48 ; RJ1.3@3778.72,5975.88 3778.72,5947.58 3766.02,5934.78 3592.32,5934.78 3570.32,5912.78 3570.32,5782.48 3590.42,5762.38 3590.42,5731.28 C37.1@3576.99,5717.9 3587.22,5717.88 3622.32,5682.88 3622.32,5570.28 3584.52,5532.48 R38.1@3582.92,5532.48
SD_CLK-P: R15.2 TF_CARD1.5 U7.3 | length 858
  Top Layer w10: TF_CARD1.5@4509.28,6004.52 4510.07,6005.3 4510.07,6099.79 4510.85,6100.58 v1(4510.85,6110.02)
  Top Layer w11.81: v1(4508.88,5960.02) 4508.89,6004.12 TF_CARD1.5@4509.28,6004.52 ; v1(4650.22,5901.76) 4650.22,5869.87 R15.2@4650.61,5869.49
  Bottom Layer w10: U7.3@4314.4,6293.69 4292.54,6293.68 4268.73,6269.87 4268.73,6124.2 4268.73,6122.23 4280.94,6110.02 v1(4510.85,6110.02)
  Bottom Layer w11.81: v1(4508.88,5960.02) 4508.89,5897.43 4530.54,5875.78 4625.42,5875.78 4625.42,5876.96 v1(4650.22,5901.76)
SPEED_LED: R48.2 RJ1.9 U5.2 | length 1896.5
  Top Layer w7.09: R48.2@3504.12,5295.88 3477.82,5322.28 3403.42,5322.28 3395.12,5330.48 3395.12,5926.18 3543.12,6074.18 3717.52,6074.18 3799.02,6155.68 3799.02,6323.38 3819.92,6344.28 3941.92,6344.28 3964.62,6366.88 RJ1.9@3964.59,6418.81
  Top Layer w11.02: R48.2@3504.12,5295.88 3504.12,5264.38 3514.82,5253.68 3544.72,5253.68 3566.72,5231.68 3566.72,5203.68 3635.92,5134.58 U5.2@3677.79,5134.61
TXD0: DEBUG.a U1.101 UART0.3 | length 3999.1
  Top Layer w10: U1.101@3926.21,4334.03 3926.22,4400.58 3992.72,4467.08 4117.52,4467.08 4157.72,4507.28 4157.72,4606.88 4246.32,4695.48 4624.62,4695.48 4802.22,4872.98 4802.22,5559.68 v1(4799.04,5562.78)
  Top Layer w11.81: v1(4773.02,6269.88) 4905.32,6269.88 UART0.3@4905.73,6269.48
  Bottom Layer w10: v1(4799.04,5562.78) 4814.02,5577.78 4942.32,5577.78 4982.52,5617.88 4982.52,6224.18 4937.22,6269.48 UART0.3@4905.73,6269.48
  Bottom Layer w11.81: DEBUG.a@4331.72,5603.68 4331.72,5608.88 4407.32,5684.48 4754.92,5684.48 4794.32,5723.78 4794.32,6248.58 v1(4773.02,6269.88)
TXN: C36.1 R42.1 RJ1.2 U5.20 | length 1256.5
  Top Layer w10.98: U5.20@3786.82,5179.08 3786.82,5297.08 3871.52,5381.68 3871.52,5485.98 3911.62,5526.18 R42.1@3925.42,5526.18 ; RJ1.2@3828.72,5875.18 3818.72,5885.18 3818.72,6017.88 3840.02,6039.18 3914.02,6039.18 3943.92,6009.28 3943.92,5786.78 3909.72,5752.58 3909.72,5731.68 C36.1@3923.45,5717.9 3916.32,5717.88 3872.32,5673.78 3872.32,5570.68 3910.42,5532.48 R42.1@3923.42,5532.48
TXP: C35.1 R41.1 RJ1.1 U5.21 | length 1212.7
  Top Layer w10.98: U5.21@3767.12,5184.58 3767.12,5306.88 3851.82,5391.48 3851.82,5487.18 3807.92,5530.98 3807.92,5532.48 3814.02,5532.48 3853.02,5571.48 3853.02,5680.48 3815.62,5717.88 3807.92,5717.88 3807.92,5722.08 3850.62,5764.78 3893.52,5764.78 3923.42,5794.68 3923.42,6000.98 3905.32,6019.08 3857.72,6019.08 3838.82,6000.18 3838.82,5951.38 3851.02,5939.18 3868.72,5939.18 3878.72,5949.18 RJ1.1@3878.72,5975.88
USB0_DM: R12.2 R33.2 R53.2 U1.124 | length 5101.1
  Top Layer w9.84: R33.2@2462.04,4427.35 2484.52,4427.38 2493.52,4436.38 2493.52,4472.58 2525.02,4504.08 2525.02,4561.98 2569.92,4606.88 3307.32,4606.88 v1@3317.12,4616.68
  Top Layer w10: R12.2@3174.64,6149.79 3162.02,6137.18 3162.02,6103.38 3315.62,5949.78 3315.62,4712.78 v1@3370.72,4656.78 ; v1(3370.7,4657.27) 3410.12,4617.88 3540.42,4617.88 3564.02,4594.28 U1.124@3564.01,4334.03 ; R53.2@4362.43,4761.2 4362.43,4742.71 v1@4373.85,4731.29
  Bottom Layer w10: v1(3370.7,4657.27) 3357.32,4657.28 3317.12,4616.68 3317.12,4586.38 3329.32,4574.18 3364.42,4574.18 3375.42,4584.48 3428.92,4637.98 3612.82,4637.98 3854.92,4395.88 4054.92,4395.88 4156.92,4497.78 4490.02,4497.78 4583.72,4591.48 4583.72,4767.08 4568.72,4782.08 4388.82,4782.08 4373.82,4767.08 v1@4373.82,4731.28
  other v1: 3317.15,4616.72 4373.85,4731.29
USB0_DM_E: R53.1 USB2.2 | length 371
  Top Layer w7.87: USB2.2@4282.32,5151.38 4325.82,5107.88 4325.82,5012.38 4362.82,4975.38 4362.82,4823.38 4362.42,4823.38 R53.1@4362.43,4816.32
  Top Layer w10: USB2.2@4281.58,5150.58 USB2.2@4282.34,5151.34
  Top Layer w15.75: USB2.2@4281.58,5150.58 USB2.2@4282.34,5151.34
USB0_DP: R13.2 R27.2 R54.2 U1.125 | length 5359.5
  Top Layer w9.84: R27.2@2462.92,4504.08 2481.72,4504.08 2503.42,4525.78 2503.42,4574.78 2552.42,4623.78 3291.92,4623.78 v1@3327.02,4658.78
  Top Layer w10: R13.2@3100.62,6149.79 3100.62,6109.98 3114.82,6095.88 3141.12,6095.88 3296.32,5940.68 3296.32,4689.18 v1(3326.02,4659.44) ; v1@3326.02,4659.48 3384.82,4600.58 3531.32,4600.58 3548.22,4583.68 U1.125@3548.21,4334.03 ; R54.2@4436.44,4761.6 4439.59,4758.47 v1(4439.59,4730.5)
  Bottom Layer w10: v1@3326.02,4659.48 3326.02,4657.48 3287.62,4619.08 3287.62,4584.88 3316.02,4556.48 3377.42,4556.48 3440.42,4619.48 3604.12,4619.48 3845.52,4378.18 4062.82,4378.18 4163.22,4478.58 4497.82,4478.58 4602.22,4582.88 4602.22,4778.18 4578.22,4802.18 4377.42,4802.18 4346.32,4771.08 4346.32,4720.28 4362.02,4704.48 4421.52,4704.48 4439.62,4722.58 v1(4439.59,4730.5)
USB0_DP_E: R54.1 USB2.3 | length 488
  Top Layer w7.87: USB2.3@4282.32,5230.18 4282.32,5222.38 4340.02,5164.78 4340.02,5019.88 4375.82,4984.08 4375.82,4861.98 4421.12,4816.68 R54.1@4436.44,4816.73
  Top Layer w15.75: USB2.3@4281.13,5228.93 USB2.3@4282.34,5230.14
USB0_ID: U1.1 U9.2
USB0_REXT: R51.2 U1.127 | length 172.4
  Top Layer w10: R51.2@3514.02,4502.98 3517.52,4502.98 U1.127@3517.52,4334.08
USB1_DM: R39.1 R58.2 U1.119 | length 3137.1
  Top Layer w9.84: R39.1@2463.61,4351.37 2490.42,4351.38 2520.32,4381.28 2520.32,4459.28 2548.22,4487.18 2548.22,4550.18 2588.02,4589.98 3338.42,4589.98 v1(3349.83,4601.37)
  Top Layer w10: v1(3434.48,4660.03) 3595.47,4660.03 3642.72,4612.78 U1.119@3642.71,4334.03 ; R58.2@4513.21,4760.82 4514.4,4759.63 v1(4514.4,4728.92)
  Bottom Layer w10: v1(3349.83,4601.37) 3358.1,4601.37 3416.76,4660.03 v1(3434.48,4660.03) ; v1@3434.52,4660.08 3618.72,4660.08 3866.02,4412.78 4045.12,4412.78 4149.02,4516.68 4478.92,4516.68 4514.42,4552.18 v1(4514.4,4728.92)
USB1_DM_E: R58.1 USB2.6 | length 563
  Top Layer w10: USB2.6@4384.72,5151.38 4426.52,5151.38 4449.02,5173.78 4540.42,5173.78 4575.42,5138.78 4575.42,4883.28 4513.22,4821.08 R58.1@4513.22,4815.98
USB1_DP: R23.1 R59.2 U1.120 | length 3076.2
  Top Layer w9.84: R23.1@2463.22,4579.32 2473.02,4579.28 2534.92,4641.08 3271.83,4641.08 v1(3289.6,4658.85)
  Top Layer w10: v1(3397.08,4682.07) 3397.08,4659.24 3419.14,4637.18 3588.82,4637.18 3627.02,4598.98 U1.120@3627.01,4334.03 ; v1(4558.49,4751.37) 4582.9,4751.37 R59.2@4592.75,4761.21
  Bottom Layer w10: v1(3289.6,4658.85) 3312.04,4681.29 3396.3,4681.29 v1(3397.08,4682.07) ; v1(3397.08,4682.07) 3626.22,4682.08 3878.62,4429.68 4038.42,4429.68 4142.72,4534.08 4471.52,4534.08 4495.52,4558.08 4495.52,4700.98 4485.22,4711.18 4485.22,4737.18 4499.42,4751.38 v1(4558.49,4751.37)
USB1_DP_E: R59.1 USB2.7 | length 572.5
  Top Layer w10: USB2.7@4384.72,5230.18 4409.22,5230.18 4448.22,5191.08 4547.42,5191.08 4592.72,5145.88 R59.1@4592.75,4816.33
USB1_REXT: R52.2 U1.122 | length 169.1
  Top Layer w10: U1.122@3595.51,4334.03 R52.2@3595.52,4503.12
X2_IN: C47.2 U1.40 X2.1 | length 420.9
  Top Layer w9.84: C47.2@3389.2,3584.61 3452.72,3584.58 3436.22,3568.08 X2.1@3442.44,3568.07 3429.92,3568.08 3471.52,3609.68 3595.12,3609.68 3611.32,3625.88 U1.40@3611.32,3735.88
X2_OUT: C48.2 U1.41 X2.2 | length 214.8
  Top Layer w9.84: X2.2@3572.19,3566.16 3572.22,3579.28 3610.42,3579.28 3627.12,3595.98 U1.41@3627.12,3735.88
X_IN: C49.2 R55.1 U1.103 X3.1 | length 409.5
  Top Layer w10: U1.103@3894.82,4334.28 3894.82,4399.48 3962.42,4467.08 R55.1@3962.43,4476.57 3968.32,4476.58 3999.02,4507.28 3999.02,4566.28 4032.52,4599.78 4039.22,4599.78 4041.52,4597.48
  Top Layer w11.02: 4041.52,4597.48 4059.22,4597.48 4079.82,4576.88 C49.2@4106.52,4576.88
X_OUT: C46.2 R55.2 U1.104 X3.3 | length 299.4
  Top Layer w10: U1.104@3879.12,4334.28 3879.12,4414.48 3929.02,4464.38 R55.2@3929.03,4476.57 ; R55.2@3929.03,4476.57 3929.03,4508.53 X3.3@3954.94,4534.45
  Top Layer w11.02: C46.2@3889.2,4539.56 3949.82,4539.56 X3.3@3954.94,4534.45
XTAL1: C41.2 R50.1 U5.5 X1.1 | length 338.9
  Top Layer w9.45: 3426.83,5023.72 3467.43,5064.32 3551.63,5064.32 3578.59,5064.32 R50.1@3580.78,5066.51
  Top Layer w11.02: 3426.84,5023.77 3426.84,4969.11 C41.2@3435.18,4960.77 ; R50.1@3580.78,5066.51 3589.87,5075.61 U5.5@3677.79,5075.61
XTAL2: C40.1 R50.2 U5.4 X1.3 | length 255.3
  Top Layer w9.45: X1.3@3513.61,5095.86 3555.53,5095.86 3576.73,5095.86 R50.2@3580.78,5099.91
  Top Layer w11.02: C40.1@3492.35,5174.6 3492.36,5117.12 X1.3@3513.61,5095.86 ; R50.2@3580.78,5099.91 3585.38,5095.31 U5.4@3677.79,5095.31
pads on no net: B1.0 RJ1.7 RJ1.15 RJ1.16 TF_CARD1. U3.3 U3.4 U3.5 U3.6 U3.10 U3.11 U3.14 U3.15 U3.20 U3.21 U3.22 U3.26 U3.27 U3.28 U3.33 U3.35 U3.38 U3.40 U3.45 U3.46 U3.47 U13.15 U13.16 U13.17 U13.19 U45.9 USB1.4
copper on no net: | length 18191.1
  Top Layer w9.84: 3149.83,4132.64 3149.83,4145.06 3157.71,4152.93 3445.91,4152.93 ; v1(4029.36,3171.05) 4028.18,3172.24 4028.18,3227.36 4051.01,3250.19 4119.51,3250.19 ; v1(4489.99,3576.96) 4490.02,3637.98 4519.32,3667.38 v1(4695.1,3668.3)
  Top Layer w10: 4044.42,4105.98 4314.72,4105.98 4360.72,4151.98 4372.62,4151.98 ; 4465.97,6004.51 4465.97,6046.25 4486.44,6066.72 4486.44,6178.53 4503.37,6195.46 v1(4563.21,6195.46)
  Top Layer w10.24: 2676.62,4432.48 2679.32,4429.68 2679.72,4415.98 2756.12,4339.58 3330.92,4339.58 3391.52,4278.98 3445.92,4278.98 ; 3446.02,3979.98 3498.82,3979.98 3551.42,4032.58 3551.42,4103.38 3501.32,4153.18 3446.02,4153.18 ; 3532.62,4334.28 v1(3532.62,4280.5) 3532.62,4274.58 3597.32,4209.68 3912.12,4209.68 3910.62,4334.28 ; 3611.22,4334.08 3611.22,4281.68 v1(3612.03,4280.89) ; 3911.39,4272.5 3911.49,4123 v1(3918.84,4115.65) 3928.49,4106 4044.39,4106 ; 3926.29,3735.9 3926.29,4103.82 3928.47,4106
  Top Layer w11.02: v1(3289.99,3176.96) 3323.42,3210.78 3363.62,3210.78 ; v1(3302.19,3372.63) 3302.19,3404.91 3324.64,3427.36 3363.62,3427.38
  Top Layer w11.81: 2247.82,4807.28 2252.22,4811.58 2397.82,4811.58 2430.52,4844.28 2490.02,4844.28 ; 2704.95,4528.53 2819.13,4528.53 v1(2838.42,4509.24) ; 3060.19,3380.1 3039.99,3400.3 3039.99,3482.08 3078.18,3482.08 3083.69,3482.08 3099.44,3497.83 3099.44,3594.68 3111.25,3606.49 3212.82,3606.49 ; 3161.49,3022.58 3161.49,2948.86 3160.86,2948.22 3198.74,2948.22 3225.12,2974.6 3363.61,2974.6 3428.62,2974.58 3460.02,3006.08 4007.32,3006.08 v1(4028.18,3026.96) ; v1(4029.36,3171.05) 4048.64,3151.77 4119.51,3151.77 ; 4029.36,3210.82 4063.17,3210.82 4119.51,3210.82 ; 4347.08,5814.38 4362.43,5799.02 v1(4362.43,5783.65) ; 4420.3,5813.97 4420.3,5791.53 v1(4428.18,5783.65) ; 4435.42,3031.06 4435.42,3077.38 ; v1(4465.58,5959.63) 4465.58,6006.48 4467.55,6008.45 ; 4491.95,5814.77 4494.71,5812.01 v1(4494.71,5784.43) ; 4578.57,5814.77 4586.44,5806.89 v1(4586.44,5782.07) ; v1(4699.43,5806.88) 4714.38,5806.88 4722.27,5814.77
  Top Layer w15.75: v1@3122.88,3372.66 v1(3120.19,3369.97) 3120.19,3200.1 ; 3160.19,3022.54 3132.75,3022.54 3120.19,3035.1 3120.19,3200.1 ; 3165.19,3177.54 3142.75,3177.54 3120.19,3200.1 ; 4342.35,3183.85 4344.32,3181.89 4344.32,3077.37 ; 4344.32,3077.38 4644.72,3077.38 4696.72,3129.28 4696.72,3668.28 v1(4695.1,3668.3)
  Top Layer w19.68: 3060.19,3380.1 3067.63,3372.66 3165.19,3372.66 3166.84,3371.01 v1(3204.79,3371.01) ; 3551.42,4103.38 3595.5,4147.46 v1(3595.5,4210.38) ; 4114.42,5815.48 4123.02,5806.88 4197.82,5806.48 ; 4197.86,5806.49 v1(4234.86,5806.49) 4265.18,5806.49 4272.66,5813.98 ; v1(4418.33,3574.99) 4418.33,3544.28 4419.12,3543.5
  Top Layer w23.62: v1(2912.43,4384.04) 2912.43,4416.49 2914.79,4418.85 ; 3026.29,4498.89 3056.41,4498.89 v1(3067.15,4509.63) 3069.35,4507.44 3134.87,4507.44 ; 4372.66,4151.99 4412.82,4151.99 ; 4412.82,4151.38 4451.4,4151.37 4484.32,4173.48 ; 4484.32,4174.18 4484.32,4171.88 4578.82,4171.88
  Top Layer w31.5: 4138.81,5342.72 4138.81,5343.49
  Top Layer w39.37: 2241.52,4745.08 2241.52,4762.38 ; 2709.72,4716.28 2722.22,4728.88
  Bottom Layer w10: v1(4563.21,6195.46) 4596.08,6195.46 4597.86,6193.69
  Bottom Layer w10.24: v1(3532.62,4280.5) 3533.01,4280.9 v1(3612.03,4280.89)
  Bottom Layer w11.02: v1(3204.79,3371.01) 3204.79,3372.63 v1(3302.19,3372.63)
  Bottom Layer w11.81: v1(3204.79,3371.01) 3204.82,3280.77 3177.03,3251.81 3177.36,3188.52 3188.91,3176.96 v1(3289.99,3176.96) ; v1(4028.18,3026.96) 4029.36,3026.96 v1(4029.36,3171.05) ; v1(4362.43,5783.65) v1(4428.18,5783.65) 4493.93,5783.65 v1(4494.71,5784.43) 4584.08,5784.43 v1(4586.44,5782.07) 4674.62,5782.07 v1(4699.43,5806.88) ; v1(4418.33,3574.99) 4489.99,3574.99 v1(4489.99,3576.96) ; 4465.62,5782.08 4465.62,5797.98 v1@4465.62,5959.68
  Bottom Layer w15.75: v1@3118.72,3371.38 v1(3120.19,3369.97)
  Bottom Layer w19.68: v1@3067.12,4509.68 3067.12,4230.48 3087.32,4210.38 v1(3595.5,4210.38) 3640.42,4210.38 3754.52,4096.28 3900.72,4096.28 v1@3918.92,4115.48
  Bottom Layer w23.62: v1(4443.14,4150.97) 4443.14,4144.68 4462.03,4125.78 4638.02,4125.78 ; v1(4695.1,3668.3) 4695.12,3719.88 4645.12,3769.88 4645.12,4300.98 4802.22,4458.08 4816.72,4458.08
  Bottom Layer w31.5: 2300.62,4458.08 2400.62,4458.08 2480.52,4537.98 2531.33,4537.98 2722.27,4728.92 3241.53,5248.18 4043.92,5248.18 4138.82,5343.48 ; v1(2838.42,4509.24) 2838.81,4509.63 v1(3067.15,4509.63) ; 4231.72,5703.68 4191.52,5703.68 4161.22,5673.38 4161.22,5576.98 4190.42,5547.78 4602.22,5547.78 4660.02,5489.98 4660.02,4553.38 4755.32,4458.08 4816.72,4458.08 ; 4231.72,5703.73 4234.86,5706.88 v1(4234.86,5806.49) 4362.43,5806.49 v1(4362.43,5783.65)
  Bottom Layer w39.37: 2722.27,4728.92 2838.42,4612.77 v1@2838.42,4509.28 ; v1(2838.42,4509.24) 2838.42,4157.68 3121.12,3874.98 v1@3121.12,3371.38 ; 4815.93,4458.9 4816.76,4458.06
  other v1: 3160,2792.7 3160,2818.68 3160,2844.66 3923.45,2960.42 3950.62,2961.61 3977.39,2961.61 3205.72,3036.05 3621.09,3035.62 3648.65,3035.62 3675.03,3036.01 4208.88,3162.39 4208.1,3191.13 3491.17,3215.94 3517.15,3215.94 3543.14,3215.94 3164,3282.08 2575.42,3319.09 2595.9,3341.13 3484.87,3349.4 3513.61,3349.4 3541.96,3349.4 4595.5,3380.11 4624.24,3380.5 4084.47,3475.38 4117.55,3476.16 3204.16,3504.91 3230.15,3504.91 3256.13,3504.91 4050.6,3589.16 4083.68,3589.95 4115.17,3590.74 3316.76,3758.45 3344.32,3758.45 3289.2,3759.24 3737.63,3949.4 3778.77,3949.4 3819.91,3949.4 4567.54,4062 3110.46,4100.19 3054.56,4100.97 3082.9,4100.97 4704.55,4182.47 4680.14,4206.49 4519.12,4378.14 4486.84,4378.93 3096.29,4422.23 3122.27,4422.23 3148.26,4422.23 3434.87,4565.93 3459.67,4566.33 3593.93,4591.52 3443.93,4740.34 3657.31,4746.25 3621.09,4746.64 4140.8,4886 2419.52,4902.15 4140.8,4927.14 2419.52,4928.14 3201.6,4932.48 3242.74,4932.47 3546.68,4954.12 2418.73,4954.91 3201.2,4961.61 3242.35,4961.61 4140.81,4968.28 3999.44,4994.67 5018.31,5193.92 5018.31,5235.06 5018.31,5276.21 3462.04,5450.18 3503.18,5450.18 3544.32,5450.18 4061.23,5477.29 4061.23,5518.43 3021.88,5557.66 3063.02,5557.66 3104.16,5557.66 4061.23,5559.57 3023.06,5592.7 3064.2,5592.7 3105.34,5592.7 4483.29,5622.23 4524.43,5622.23 4565.58,5622.23 3750.62,5660.81 3750.62,5692.51 3750.62,5724.2 2614.02,5865.4 2639.99,5865.34 2666.38,5865.01 2639.99,5906.48 2666.38,5906.15 2614.02,5906.54 2666.38,5947.29 2614.02,5947.68 2639.99,5947.62 4552.58,5961.99 4552.19,6037.19 3251.41,6059.24

## Other copper
Top Layer:
  rectangle net LX3: 2340.78,5003.73 2560.46,5082.07
  rectangle net LX2: 2684.28,4930.11 2760.26,5081.29
  rectangle net LX1: 2684.48,5164.35 2759.68,5328.14
  rectangle net +5V: 2247.47,5082.86 2320.31,5506.88
  rectangle net LX2: 2684.48,4926.56 2893.14,4982.07
  rectangle net LX3: 2299.83,4824.2 2365.58,5066.72
  rectangle net LX1: 2684.48,5321.84 2889.6,5374.99
  rectangle net 3.3V: 2220,4726.17 2270,4950
  rectangle: 2149.83,4849.39 2278.18,4955.89
  rectangle net +5V: 2238.42,5421.83 2578.97,5571.44
  rectangle net NetC195_1: 2228.58,5704.12 2526.22,5786.8
  rectangle net DCIN: 2328.57,5945.26 2427.78,6122.03
  rectangle net DCIN: 2328.57,6058.84 2721.48,6122.23
  rectangle net DCIN: 2411.64,6060.03 2723.06,6277.74
  rectangle net DCIN: 2646.68,6157.27 2892.74,6399
  rectangle net +5V: 2476.21,5519.48 2579.36,5683.65
  rectangle net NetC195_1: 2228.38,5619.08 2435.86,5740.34

## Silkscreen, mask and mechanical layers (free items; w line width, h text height)
Top Overlay:
  text "G  R  T" at 5017.72,6047.95 h47.24 r90
  text "Galaxy NUC980DK61 Dev Board 6.0(201907)" at 2136.49,3852.23 h59.05 r90
  text "3V3          RXD / GND          TXD" at 0,0 h31.5
  text "PG5(UART0MSG) / PG3(WTD) / PG8 / PG9" at 0,0 h55.12 r90
  text "BOOT1 / BOOT0" at 0,0 h55.12 r90

## Text inside footprints (layer, text, board x,y; h text height)
DEBUG: Document "3" at 4420.3,5694.11 h40; Document "1" at 4412.82,5590.17 h40; Document "4" at 4166.03,5698.32 h40 r324; Document "2" at 4171.88,5600.41 h40
SW1: Top Overlay "4" at 3014.39,2817.41 h19.68 r145; Top Overlay "3" at 2913.74,2819.89 h19.68 r180; Top Overlay "2" at 2813.74,2819.89 h19.68 r180; Top Overlay "1" at 2713.74,2819.19 h19.68 r180; Top Overlay "ON" at 2663.74,2999.5 h19.68
SW2: Top Overlay "2" at 2555.85,2819.88 h19.68 r180; Top Overlay "1" at 2455.85,2819.18 h19.68 r180; Top Overlay "ON" at 2405.85,2999.49 h19.68